# Altium PCB MADI_ESP32-S3_PCB.PcbDoc (part 3 of 3)
Units mm, origin at the board's own origin, x right, y up, seen from the top; angles counter-clockwise.
Board outline 30 x 21.59 mm, 4 copper layers (L1, L2 (GND), L3 (GND), L4), stack 1.564 mm thick; 54 components, 48 nets, 271 pads, 173 vias.
Unrouted connection lines stored in the file: 120.
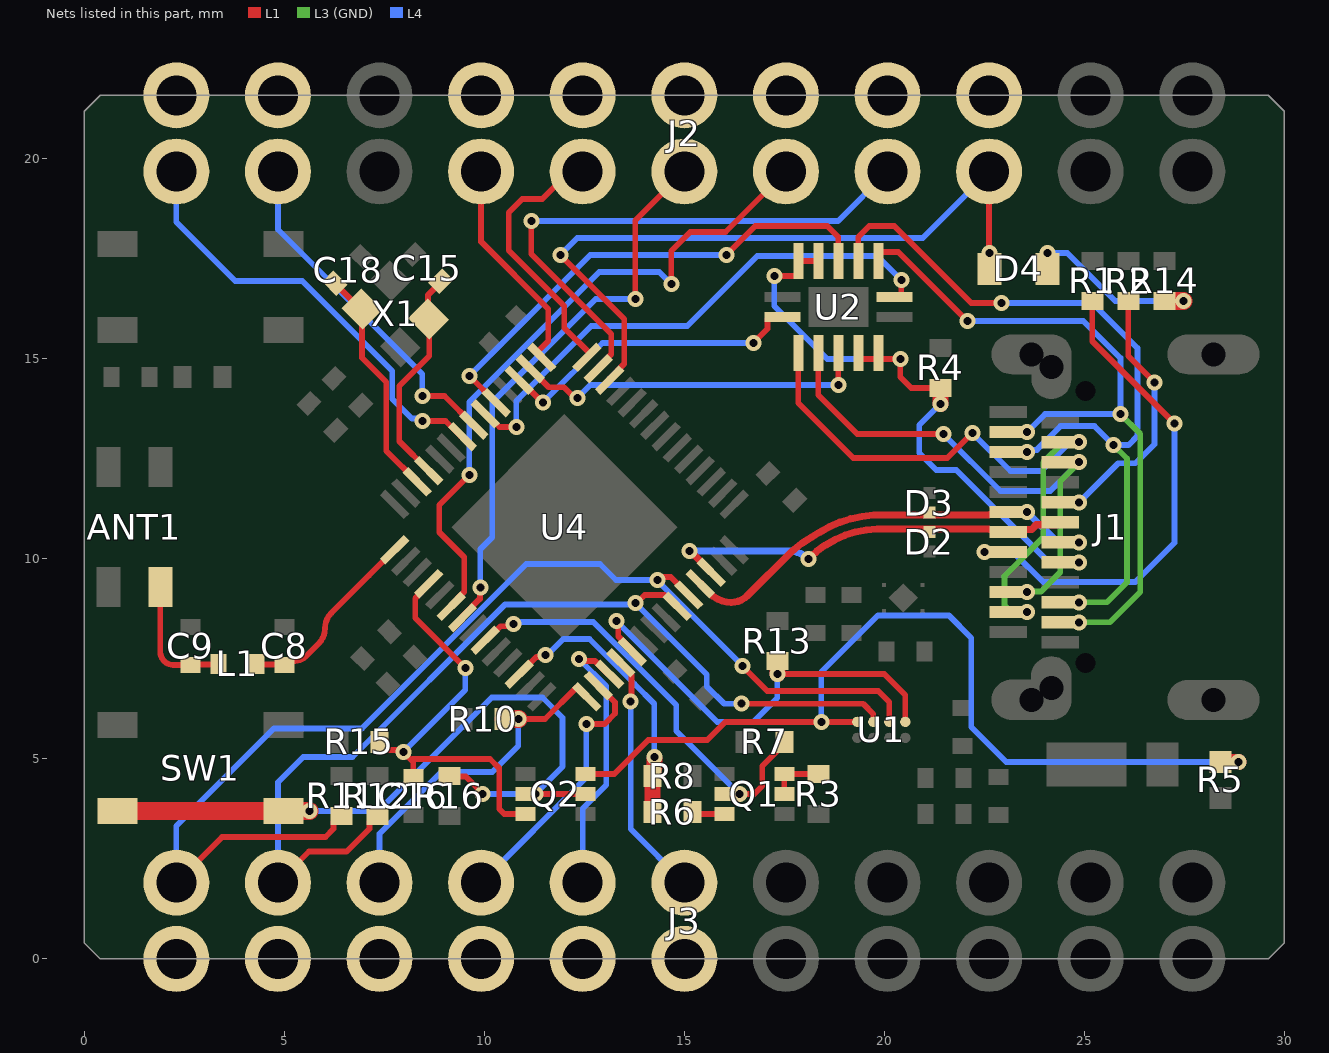
[diagram p4: the nets of this part, all layers, seen from the top]

## Via types
v1: diameter 0.4, hole 0.2, L1 to L4, tented both sides, 173 vias

## Nets (pads, with @x,y where several pads share a name; then routed paths per layer and width w, separated by ;. In a path a pad name is that pad's centre, name@x,y a point inside that pad or via, vN(x,y) a via of type N, cw(c..) or ccw(c..) an arc to the next point about the centre after c; other vN are vias at no path point) (continued)
IO1: J2.5 U4.6 | length 16.8
  L1 w0.146: U4.6@9.172,8.815 9.172,8.85 9.5,9.179 9.5,10.042 8.875,10.667 8.875,11.35 v1(9.625,12.1) ; v1(14.675,16.875) 14.675,17.7 15.15,18.175 16.03,18.175 J2.5@17.54,19.685
  L4 w0.146: v1(9.625,12.1) 9.625,13.925 12.875,17.175 14.374,17.175 v1(14.675,16.875)
IO2: J2.6 U4.7 | length 14
  L1 w0.146: U4.7@9.454,8.532 9.454,8.568 9.888,9.001 9.888,9.279 v1(9.9,9.291) ; v1(13.775,16.5) 13.775,18.46 J2.6@15,19.685
  L4 w0.146: v1(9.9,9.291) 9.9,10.241 10.2,10.541 10.2,13.916 12.784,16.5 v1(13.775,16.5)
IO4/EN_VBAT_MON: Q1.2 R7.2 U4.9 | length 11.1
  L1 w0.146: U4.9@10.02,7.967 10.055,7.967 10.406,8.318 10.668,8.318 v1(10.725,8.375) ; v1(16.375,4.125) 16.75,4.125 16.95,4.325 16.95,4.825 17.5,5.375 R7.2@17.5,5.425
  L1 w0.35: Q1.2@16,4.125 v1(16.375,4.125)
  L4 w0.146: v1(10.725,8.375) 10.775,8.425 12.725,8.425 14.8,6.35 14.8,5.7 v1(16.375,4.125)
IO7/VBAT_MON: R6.1 R8.2 U4.12 | length 7.2
  L1 w0.146: U4.12@10.869,7.118 11.303,7.552 11.477,7.552 v1(11.525,7.6)
  L1 w0.4: R6.1@14.2,3.625 14.2,4.525 14.225,4.55 14.225,4.767 14.25,4.792 v1@14.25,5
  L4 w0.146: v1(11.525,7.6) 11.576,7.6 11.976,8 12.63,8 13.755,6.875 14.25,6.38 v1@14.25,5
  other v1: 14.25,5.05
IO10/SPI_nCS: J3.9 R10.1 U4.15 | length 8.8
  L1 w0.146: v1(10.85,6) 11.518,6 12.301,6.782 12.336,6.782 U4.15@12.566,6.552
  L1 w0.45: R10.1@10.475,6 v1(10.85,6)
  L4 w0.146: J3.9@7.38,1.905 7.38,3.13 8.925,4.675 10.2,4.675 10.85,5.325 v1(10.85,6)
IO11/SPI_MOSI: J3.8 U4.16 | length 6.9
  L1 w0.146: v1(12.55,5.875) 13.007,5.875 13.267,6.135 13.267,6.417 U4.16@12.849,6.835
  L4 w0.146: J3.8@10.054,1.905 J3.8@9.92,1.905 12.55,4.535 v1(12.55,5.875)
IO12/SPI_CLK: J3.7 U4.17 | length 7
  L1 w0.146: v1(12.367,7.5) 12.415,7.452 12.762,7.452 13.096,7.118 U4.17@13.131,7.118
  L4 w0.146: v1(12.367,7.5) 13.05,6.817 13.05,4.35 12.46,3.76 J3.7@12.46,1.905
IO13/SPI_MISO: J3.6 U4.18 | length 6.2
  L1 w0.146: U4.18@13.414,7.401 13.414,7.366 13.678,7.102 13.678,6.46 v1(13.659,6.441)
  L4 w0.146: v1(13.659,6.441) 13.659,3.246 J3.6@15,1.905
IO14/nIRQ_BQ: R13.1 U1.A1 U4.19 | length 11.3
  L1 w0.146: v1(13.3,8.45) 13.348,8.402 13.348,8.068 13.697,7.719 U4.19@13.697,7.684 ; v1(17.325,7.125) 20,7.125 20.525,6.6 U1.A1@20.525,5.925
  L1 w0.4: v1(17.325,7.125) R13.1@17.325,7.45
  L4 w0.146: v1(13.3,8.45) 15.825,5.925 16.725,5.925 17.325,6.525 v1(17.325,7.125)
IO17/I2C_SDA: J3.10 R12.1 U1.C1 U4.23 | length 25.3
  L1 w0.146: J3.10@4.84,1.905 5.619,2.684 6.559,2.684 7.128,3.253 7.128,3.425 7.324,3.62 R12.1@7.325,3.62 ; v1(13.775,8.9) 13.809,8.9 14.009,9.1 14.508,9.1 14.793,8.815 U4.23@14.828,8.815 ; v1@16.425,6.375 v1(16.43,6.38) 19.47,6.38 19.725,6.125 U1.C1@19.725,5.925
  L4 w0.146: J3.10@4.84,1.905 4.84,4.415 5.475,5.05 6.707,5.05 10.522,8.864 13.739,8.864 v1(13.775,8.9) 15.562,7.113 15.562,6.813 15.995,6.38 v1(16.43,6.38)
IO18/I2C_SCL: J3.11 R11.1 U1.B1 U4.24 | length 29.8
  L1 w0.146: J3.11@2.3,1.905 3.445,3.05 6.027,3.05 6.232,3.255 6.232,3.426 6.404,3.598 R11.1@6.428,3.598 ; v1(14.325,9.475) 14.393,9.475 14.466,9.548 14.661,9.548 U4.24@15.111,9.098 ; v1(16.45,7.325) 17.075,6.7 19.85,6.7 20.125,6.425 U1.B1@20.125,5.925
  L4 w0.146: J3.11@2.3,1.905 2.3,3.325 4.738,5.763 6.938,5.763 11.05,9.875 12.894,9.875 13.294,9.475 v1(14.325,9.475) 14.325,9.463 16.45,7.338 v1(16.45,7.325)
IO35: D4.K J2.3 U4.40 | length 17.6
  L1 w0.146: v1(11.9,17.6) 13.5,16 13.5,14.876 13.131,14.507 U4.40@13.131,14.472 ; v1@22.6,17.65 22.62,17.67 J2.3@22.62,19.685
  L4 w0.146: v1(11.9,17.6) 12.325,18.025 20.96,18.025 J2.3@22.62,19.685
  other v1: 22.625,17.65
IO36: J2.4 U4.41 | length 14.1
  L1 w0.146: v1(11.175,18.45) 11.175,17.624 13.175,15.624 13.175,15.117 12.849,14.79 U4.41@12.849,14.755
  L4 w0.146: v1(11.175,18.45) 18.845,18.45 J2.4@20.08,19.685
IO37: J2.7 U4.42 | length 6.8
  L1 w0.146: J2.7@12.46,19.685 12.135,19.685 11.45,19 10.95,19 10.613,18.663 10.613,17.712 12,16.325 12,15.775 12.634,15.141 12.634,15.106 U4.42@12.566,15.038
IO38: J2.8 U4.43 | length 5.5
  L1 w0.146: J2.8@9.92,19.685 9.92,17.93 11.6,16.25 11.6,15.45 11.329,15.179 11.329,15.143 U4.43@11.434,15.038
IO39/TCLK: U2.11 U4.44 | length 8.9
  L1 w0.146: U4.44@11.151,14.755 11.151,14.752 11.61,14.294 11.993,14.294 12.261,14.025 v1(12.325,14.025) ; v1(18.85,14.35) U2.11@18.85,15.15
  L4 w0.146: v1(12.325,14.025) 12.65,14.35 v1(18.85,14.35)
IO40/TDO: U2.8 U4.45 | length 7.7
  L1 w0.146: U4.45@10.869,14.472 10.89,14.472 11.447,13.914 v1(11.468,13.914) ; v1(16.725,15.4) 17.078,15.753 17.078,16 17.128,16.05 U2.8@17.3,16.05
  L4 w0.146: v1(11.468,13.914) 12.953,15.4 v1(16.725,15.4)
IO41/TDI: U2.4 U4.47 | length 12.4
  L1 w0.146: v1(9.625,14.575) 9.63,14.575 10.298,13.906 U4.47@10.303,13.906 ; v1(16.05,17.6) 16.775,18.325 18.575,18.325 18.85,18.05 U2.4@18.85,17.45
  L4 w0.146: v1(9.625,14.575) 12.65,17.6 v1(16.05,17.6)
IO42/TMS: U2.1 U4.48 | length 13.5
  L1 w0.146: U4.48@10.02,13.623 10.055,13.623 10.379,13.3 v1(10.8,13.3) ; U2.1@20.25,16.55 20.375,16.55 20.425,16.6 v1(20.425,16.975)
  L4 w0.146: v1(10.8,13.3) 10.8,13.95 12.675,15.825 15.075,15.825 16.825,17.575 19.825,17.575 v1(20.425,16.975)
MR: Q2.6 R5.2 U1.D1 | length 22.9
  L1 w0.146: Q2.6@12.525,4.625 13.25,4.625 14.1,5.475 15.575,5.475 16.025,5.925 U1.D1@19.325,5.925
  L1 w0.4: R5.2@28.4,4.925 v1(28.85,4.925)
  L4 w0.146: v1(18.425,5.925) 18.425,7.172 19.842,8.589 21.611,8.589 22.175,8.025 22.175,5.8 23.05,4.925 v1(28.85,4.925)
NetANT1_1: ANT1.1 C9.2 L1.2 | length 3.3
  L1 w0.146: ANT1.1@1.9,9.295 1.9,7.675 ccw(c2.225,7.675) 2.225,7.35 C9.2@2.65,7.35 2.662,7.362 3.337,7.362 L1.2@3.35,7.375
NetC8_2: C8.2 L1.1 U4.1 | length 5.7
  L1 w0.146: L1.1@4.3,7.375 4.312,7.362 C8.2@4.962,7.362 ; C8.2@5,7.35 5.1,7.45 5.262,7.45 ccw(c5.262,7.842) 5.54,7.565 5.859,7.884 ccw(c5.475,8.268) 6.018,8.268 cw(c6.561,8.268) 6.177,8.652 ; 6.177,8.652 7.754,10.229 U4.1@7.757,10.229 7.114,9.586
NetC15_1: C15.1 U4.53 X1.1 | length 5.5
  L1 w0.146: U4.53@8.606,12.209 7.875,12.94 7.875,14.325 8.624,15.074 8.624,15.984 X1.1@8.606,16.001 8.588,16.019 8.588,16.59 8.911,16.913 C15.1@8.911,16.939
NetC18_1: C18.1 U4.54 X1.3 | length 5.9
  L1 w0.146: C18.1@6.264,16.889 6.922,16.231 6.962,16.231 6.962,15.842 6.944,15.824 6.944,15.031 7.55,14.425 7.55,12.699 U4.54@8.323,11.926
NetD4_A: D4.A R14.1 | length 4.2
  L1 w0.45: R14.1@27,16.45 v1(27.475,16.45)
  L4 w0.146: v1(24.075,17.65) 24.575,17.65 25.775,16.45 v1@27.35,16.45
NetJ1_A5: J1.A5 R1.2 | length 12.4
  L1 w0.146: R1.2@25.2,16.45 25.2,15.441 27.251,13.39 v1(27.256,13.39)
  L4 w0.146: v1(22.506,10.17) 23.226,10.17 23.971,9.425 26.275,9.425 27.256,10.406 v1(27.256,13.39)
NetJ1_B5: J1.B5 R2.2 | length 6.3
  L1 w0.146: R2.2@26.1,16.45 26.1,15.071 v1(26.756,14.415)
  L4 w0.146: v1(24.87,11.415) 25.845,12.39 26.281,12.39 26.756,12.865 v1(26.756,14.415)
NetQ1_3: Q1.3 R6.2 | length 0.8
  L1 w0.146: R6.2@15.2,3.675 15.25,3.625 Q1.3@16,3.625
NetQ1_5: Q1.5 Q1.6 R3.1 | length 1.3
  L1 w0.146: Q1.5@17.5,4.125 Q1.6@17.5,4.625 R3.1@18.35,4.625
NetQ2_2: Q2.2 Q2.5 R16.2 SW1.1 SW1.2 | length 18.3
  L1 w0.146: R16.2@9.125,4.575 9.137,4.563 9.537,4.563 9.95,4.15 v1(9.95,4.125) ; v1(11.275,4.125) Q2.5@12.525,4.125
  L1 w0.45: SW1.2@0.825,3.7 SW1.1@4.975,3.7 v1(5.625,3.7)
  L4 w0.146: v1(5.625,3.7) 7.35,3.7 10.185,6.535 11.452,6.535 11.957,6.03 11.957,4.807 v1(11.275,4.125) v1(9.95,4.125)
nRESET: C16.2 Q2.3 R15.1 U4.4 | length 11
  L1 w0.146: R15.1@7.375,5.425 7.375,5.375 7.525,5.225 7.925,5.225 v1(7.975,5.175) 8.225,4.925 ; C16.2@8.225,4.55 8.225,5 10.14,5 10.375,4.765 10.375,3.75 10.5,3.625 Q2.3@11.025,3.625 ; U4.4@8.606,9.381 8.606,9.345 8.275,9.015 8.275,8.525 v1(9.525,7.275)
  L4 w0.146: v1(7.975,5.175) 9.525,6.725 v1(9.525,7.275)
SW_CONTROL: J1.B8 R4.2 U2.5 U2.6 U2.12 U2.13 | length 15.7
  L1 w0.146: v1(17.25,17.075) 17.8,17.075 17.85,17.125 U2.6@17.85,17.175 ; U2.6@17.85,17.238 U2.6@17.85,17.45 U2.5@18.35,17.45 ; U2.12@19.35,15.15 19.35,15.05 19.4,15 19.8,15 U2.13@19.85,15.05 ; U2.13@19.85,15.15 U2.13@19.85,15.05 ; R4.2@21.4,14.275 20.675,14.275 20.4,14.55 v1(20.4,15) 19.9,15 U2.13@19.85,15.05
  L1 w0.4: v1(21.4,13.875) R4.2@21.4,14.275
  L4 w0.146: v1(17.25,17.075) 17.25,16.325 18.575,15 v1(20.4,15) ; v1(21.4,13.875) 20.875,13.35 20.875,12.65 21.3,12.225 21.8,12.225 24.11,9.915 v1(24.87,9.915)
TCLK_SW: J1.A3 J1.B3 U2.10 | length 12.8
  L1 w0.146: U2.10@18.35,15.15 18.35,14.1 19.325,13.125 v1(21.475,13.125)
  L3 (GND) w0.146: v1(23.57,9.175) 23.579,9.184 23.92,9.184 24.4,9.664 24.4,11.945 v1@24.87,12.415
  L4 w0.146: v1(21.475,13.125) 22.903,11.697 24.147,11.697 v1(24.867,12.418)
TDI_SW: J1.A10 J1.B10 U2.3 | length 19.4
  L1 w0.146: U2.3@19.35,17.45 19.35,18.05 19.625,18.325 20.25,18.325 22.175,16.4 v1(22.925,16.4)
  L3 (GND) w0.146: v1(24.87,8.915) 25.565,8.915 26.066,9.416 26.066,12.51 v1(25.731,12.845)
  L4 w0.146: v1(22.925,16.4) 25.2,16.4 26.326,15.274 26.326,13.064 26.106,12.845 v1(25.731,12.845) 25.256,13.32 24.406,13.32 23.813,12.727 23.622,12.727 v1(23.57,12.675)
TDO_SW: J1.A2 J1.B2 U2.9 | length 15.5
  L1 w0.146: U2.9@17.85,15.15 17.85,13.9 19.225,12.525 21.575,12.525 v1(22.2,13.15)
  L3 (GND) w0.146: v1(23.57,8.675) 23.176,8.675 23.006,8.845 23.006,9.57 23.975,10.539 23.975,12.414 24.481,12.92 24.865,12.92 v1@24.87,12.915
  L4 w0.146: v1(22.2,13.15) 23.153,12.197 23.922,12.197 24.604,12.879 24.829,12.879 v1(24.867,12.918)
TMS_SW: J1.A11 J1.B11 U2.2 | length 17.8
  L1 w0.146: U2.2@19.85,17.45 19.85,17.625 19.9,17.675 20.35,17.675 v1(22.075,15.95)
  L3 (GND) w0.146: v1(24.87,8.415) 25.64,8.415 26.4,9.175 26.4,13.126 v1(25.906,13.62)
  L4 w0.146: v1(22.075,15.95) 24.975,15.95 25.906,15.019 ; v1(23.57,13.175) 24.015,13.62 v1(25.906,13.62) 25.906,15.03
U0RXD: J2.11 U4.50 | length 11
  L1 w0.146: v1(8.45,13.45) 9.027,13.45 9.419,13.058 U4.50@9.454,13.058
  L4 w0.146: J2.11@2.3,19.685 2.3,18.425 3.775,16.95 5.45,16.95 7.7,14.7 7.7,14 8.193,13.507 8.393,13.507 v1(8.45,13.45)
U0TXD: J2.10 U4.49 | length 8.7
  L1 w0.146: v1(8.45,14.075) 9.003,14.075 U4.49@9.737,13.341
  L4 w0.146: J2.10@4.84,19.685 4.84,18.235 8.45,14.625 v1(8.45,14.075)
USB_D_N: D3.1 J1.A7 J1.B7 U4.25 | length 10.3
  L1 w0.18: U4.25@15.408,9.381 U4.25@15.394,9.381 15.641,9.134 ccw(c16.174,9.667) 16.171,8.913 16.173,8.913 ccw(c16.174,9.48) 16.575,9.08 17.671,10.176 17.938,10.39 18.365,10.658 cw(c19.897,8.221) 19.726,11.095 19.753,11.097 cw(c19.901,7.946) 19.901,11.1 19.903,11.1 21.125,11.1 22.615,11.1 22.627,11.113 23.038,11.113 J1.A7@23.1,11.175
  L4 w0.18: v1(23.57,11.175) 24.33,10.415 v1(24.87,10.415)
USB_D_P: D2.1 J1.A6 J1.B6 U4.26 | length 10.4
  L1 w0.18: v1(15.125,10.2) cw(c15.125,10.162) 15.152,10.189 U4.26@15.677,9.664 ; v1(18.1,10) cw(c19.897,8.221) 19.822,10.749 cw(c19.901,7.946) 19.901,10.75 21.125,10.75 22.615,10.75 22.627,10.737 23.038,10.737 J1.A6@23.1,10.675 23.162,10.737 23.684,10.737 23.799,10.853 24.338,10.853 J1.B6@24.4,10.915
  L4 w0.18: v1(15.125,10.2) 17.617,10.2 cw(c17.617,9.517) 18.006,10.078 cw(c17.617,9.517) v1(18.1,10)
pads on no net: J1.0 J1.A8 U4.8 U4.10 U4.11 U4.13 U4.14 U4.21 U4.22 U4.27 U4.28 U4.30 U4.31 U4.32 U4.33 U4.34 U4.35 U4.36 U4.37 U4.38 U4.39 U4.51 U4.52

## Polygon pours and split planes (outlines as drawn)
+VIN_5V0 on L1 "NONET_L-01_P-001" (solid, remove dead copper, pour order 5): 24.55,3.725 25.175,3.725 25.65,3.25 26.05,3.65 26.05,5.405 25.815,5.64 20.525,5.64 20.525,5.41 20.915,5.41 21.325,5 22.35,5 22.6,4.75 22.6,4.35 23.925,4.35
IO14/nIRQ_BQ on L1 "NONET_L-01_P-001" (solid, remove dead copper, pour order 42): 17.6,7.675 17.6,7.225 17.7,7.125 17.325,7.125 17.325,7.675
+VSYS on L1 "NONET_L-01_P-001" (solid, remove dead copper, pour order 0): 21.225,4.825 21.075,4.975 20.75,4.975 20.24,5.485 20.24,5.525 20.01,5.525 20.01,4.44 20.175,4.275 21.225,4.275
GND on L1 "NONET_L-01_P-001" (solid, remove dead copper, pour order 3): 18.85,5 18.85,4.375 18.95,4.275 19.325,4.275 19.44,4.39 19.44,5.525 19.325,5.64 18.665,5.64 18.575,5.55 18.575,5.275
+VBAT on L1 "NONET_L-01_P-001" (solid, remove dead copper, pour order 4): 19.125,2.035 19.125,3.05 18.775,3.4 17.3,3.4 17.25,3.45 17.25,3.8 17.3,3.85 19.175,3.85 19.61,4.285 19.61,5.525 19.84,5.525 19.84,4.285 20.25,3.875 21.225,3.875 21.225,2.225 20.905,1.905 19.255,1.905
GND on L1 "NONET_L-01_P-001" (solid, remove dead copper, pour order 6): 22.175,4.775 22.175,4.225 22.6,3.8 23.1,3.8 23.445,3.455 23.445,1.905 21.795,1.905 21.775,1.925 21.775,4.775
+3V3 on L1 "NONET_L-01_P-001" (solid, remove dead copper, pour order 7): 5.65,5.15 6.153,4.647 6.153,4.351 7.599,4.351 7.6,4.35 7.6,4.8 6.825,4.8 6.6,5.025 6.6,5.8 6.7,5.9 7.9,5.9 8.622,5.178 10.978,5.178 11.374,5.574 10.726,5.574 10.725,5.575 9.85,5.575 9.7,5.725 9.7,6.6 9.375,6.925 8.025,8.275 8.025,9.224 8.694,9.893 8.27,10.318 7.575,9.623 7.575,9.353 7,8.778 7,8.528 7.588,7.94 8.45,7.078 8.45,6.65 8.1,6.3 0.225,6.3 0.225,5.525 0.6,5.15
GND on L1 "NONET_L-01_P-001" (solid, remove dead copper, pour order 8): 22.63,7.76 22.63,8.327 23.57,8.327 23.83,8.067 24.87,8.067 24.87,7.762 24.684,7.577 24.684,6.114 24.525,5.955 21.325,5.955 21.225,6.055 21.225,6.355
GND on L1 "NONET_L-01_P-001" (solid, remove dead copper, pour order 9): 6.194,6.556 6.075,6.675 6.125,6.725 6.125,7.7 6.525,8.1 6.65,8.1 7.911,6.839 7.629,6.556
+3V3 on L1 "NONET_L-01_P-001" (solid, remove dead copper, pour order 10): 7.987,10.989 6.55,12.427 5.883,13.094 6.948,14.159 7.231,13.876 7.231,12.594 8.411,11.414
GND on L1 "NONET_L-01_P-001" (solid, remove dead copper, pour order 12): 26.375,17.225 24.925,17.225 24.925,17.675 25.3,18.05 26,18.05 26.375,17.675
GND on L1 "NONET_L-01_P-001" (solid, remove dead copper, pour order 13): 7.669,16.443 7.139,16.974 7.139,17.075 6.618,17.596 7.171,18.15 8.054,18.15 8.557,17.646 8.204,17.293 8.204,16.978 8.164,16.938
GND on L1 "NONET_L-01_P-001" (solid, remove dead copper, pour order 17): 22.681,13.975 22.381,13.675 22.534,13.523 23.67,13.523 23.93,13.263 24.87,13.263 24.87,13.567 24.681,13.756 24.681,15.113 22.681,15.113
+VBUS on L1 "NONET_L-01_P-001" (solid, remove dead copper, pour order 18): 23.938,9.567 23.93,9.56 23.93,9.262 25.267,9.262 25.95,8.58 25.95,5.875 26.55,5.275 26.55,4.425 27.35,4.425 27.35,5.625 26.85,6.125 26.85,11.375 26.158,12.067 23.893,12.067 23.898,12.062 23.898,11.762 25.567,11.762 25.95,11.38 25.95,9.905 25.612,9.567
+VDD_SPI on L1 "NONET_L-01_P-001" (solid, remove dead copper, pour order 21): 15.871,11.191 16.625,11.945 16.623,12.002 17.099,12.479 17.407,12.171 16.226,10.989 16.013,10.989 15.871,11.131
+3V3 on L1 "NONET_L-01_P-001" (solid, remove dead copper, pour order 25): 14.462,7.485 14.462,7.099 14.57,6.991 14.959,7.38 14.85,7.489 14.457,7.489
GND on L1 "NONET_L-01_P-001" (solid, remove dead copper, pour order 32): 17.95,8.35 17.95,7.75 18.27,7.43 20.25,7.43 20.25,7.93 20.265,7.944 20.265,8.68 20.115,8.83 19.875,8.83 19.875,8.488 19.737,8.35
+VSYS on L1 "NONET_L-01_P-001" (solid, remove dead copper, pour order 33): 21.211,9.65 21.25,9.611 21.25,8.375 21.25,7.1 21.2,7.05 20.85,7.05 20.8,7.1 20.8,8.35 20.685,8.465 20.685,8.68 20.835,8.83 20.835,9.22 20.685,9.37 20.685,9.585 20.75,9.65
GND on L1 "NONET_L-01_P-001" (solid, remove dead copper, pour order 37): 7.975,3.8 7.975,3.2 8.325,2.85 9.05,2.85 9.4,3.2 9.4,3.8
nRESET on L1 "NONET_L-01_P-001" (solid, remove dead copper, pour order 38): 8.475,4.827 8.624,4.976 8.575,5.025 7.9,5.7 7.15,5.7 7.15,5.15 7.6,5.15 7.975,4.775 7.975,4.35 8.475,4.35
GND on L1 "NONET_L-01_P-001" (solid, remove dead copper, pour order 40): 20.306,8.488 20.306,7.985 20.265,7.944 19.875,8.334 19.875,8.83 19.912,8.83 20.475,9.393 20.843,9.025
+3V3 on L1 "NONET_L-01_P-001" (solid, remove dead copper, pour order 41): 19.795,8.9 18.725,8.9 18.725,9.275 19.1,9.65 20.225,9.65 20.265,9.61 20.265,9.37
+3V3 on L4 "NONET_L-01_P-001" (solid, remove dead copper, pour order 15): 8.073,9.473 8.073,7.99 7.991,7.909 7.25,8.65 6.875,9.025 6.875,10.157 7.559,9.473
+3V3 on L4 "NONET_L-01_P-001" (solid, remove dead copper, pour order 28): 18.725,9.1 17.85,9.1 18.725,9.975
+VSYS on L4 "NONET_L-01_P-001" (solid, remove dead copper, pour order 29): 20.175,5.05 20.175,4.1 20.55,3.725 23.375,3.725 24.335,2.765 24.335,1.905 25.985,1.905 25.985,3.04 24.75,4.275 20.9,4.275 20.575,4.6 20.575,5.05
GND on L3 (GND) "NONET_L-01_P-001" (solid, remove dead copper, pour order 24): -2.5,25 -2.5,-2.5 32.5,-2.5 32.5,25
GND on L2 (GND) "NONET_L-01_P-001" (solid, remove dead copper, pour order 23): -2.5,25 -2.5,-2.5 32.5,-2.5 32.5,25

## Keep-outs
Keep-Out Layer:
  text ".Layer_Name" at 22,-15.5 h1.52

## Other copper
L1:
  rectangle net GND: 21.55,5.955 22.325,6.25
  text ".Layer_Name" at 22,-15.5 h1.52
L2 (GND):
  text ".Layer_Name" at 22,-15.5 h1.52
L3 (GND):
  text ".Layer_Name" at 22,-15.5 h1.52
L4:
  text ".Layer_Name" at 22,-15.5 h1.52
Multi-Layer:
  pour cut-out: 6,12.795 6,8.795 0,8.795 0,12.795

## Silkscreen, mask and mechanical layers (free items; w line width, h text height)
Top Overlay:
  region: 115.3,51.8
  text ".VersionRevision" at 27.973,16.372 h1.5
  text ".Layer_Name" at 22,-15.5 h1.52
Bottom Overlay:
  text "RX" at 1.746,16.775 h1.5 r270
  text "TX" at 4.286,16.75 h1.5 r270
  text "IO1" at 16.986,16.722 h1.5 r270
  text "IO2" at 14.446,16.557 h1.5 r270
  text "GND" at 24.606,15.94 h1.5 r270
  text "3V3" at 27.146,15.94 h1.5 r270
  text "BOOT" at 0.575,15.837 h1.5 r180
  text "IO35" at 22.066,15.838 h1.5 r270
  text "GND" at 6.826,15.822 h1.5 r270
  text "IO38" at 9.366,15.822 h1.5 r270
  text "IO37" at 11.906,15.822 h1.5 r270
  text "IO36" at 19.526,15.819 h1.5 r270
  text "`" at 9.745,7.212 h15 r270
  text "ESP32-S3" at 6.925,7.094 h2.5 r270
  text "RST" at 0.665,6.887 h1.5 r180
  text "SCL" at 1.871,3.1 h1.5 r270
  text "SDA" at 4.411,3.1 h1.5 r270
  text "nCS" at 6.951,3.101 h1.5 r270
  text "MOSI" at 9.491,3.1 h1.5 r270
  text "SCK" at 12.031,3.1 h1.5 r270
  text "MISO" at 14.571,3.1 h1.5 r270
  text "GND" at 16.998,3 h1.5 r270
  text "BAT" at 19.551,3 h1.5 r270
  text "GND" at 22.078,3 h1.5 r270
  text "SYS" at 24.618,3 h1.5 r270
  text "VIN" at 27.159,3 h1.5 r270
  text ".Layer_Name" at 22,-15.5 h1.52
Top Paste:
  text ".Layer_Name" at 22,-15.5 h1.52
Bottom Paste:
  text ".Layer_Name" at 22,-15.5 h1.52
Top Solder:
  text ".Layer_Name" at 22,-15.5 h1.52
Bottom Solder:
  text ".Layer_Name" at 22,-15.5 h1.52
Drill Guide:
  text ".Layer_Name" at 22,-15.5 h1.52
Board Outline:
  the board outline again, w0
  text ".Layer_Name" at 22,-15.5 h1.52
Top Assembly:
  text "COMPONENTS MARKED 'DNP' SHOULD NOT BE POPULATED." at 0,-7.001 h1.52
  text ".Layer_Name" at 22,-15.5 h1.52
Bottom Assembly:
  text "COMPONENTS MARKED 'DNP' SHOULD NOT BE POPULATED." at 131,-7.001 h1.52
  text ".Layer_Name" at 22,-15.5 h1.52
Top Courtyard:
  text ".Layer_Name" at 22,-15.5 h1.52
Bottom Courtyard:
  text ".Layer_Name" at 22,-15.5 h1.52
Top 3D Body:
  text ".Layer_Name" at 22,-15.5 h1.52
Bottom 3D Body:
  text ".Layer_Name" at 22,-15.5 h1.52
Top Designator:
  text ".Layer_Name" at 22,-15.5 h1.52
Bottom Designator:
  text ".Layer_Name" at 22,-15.5 h1.52
Gerber Information:
  lines w0.1: 0,-17 111,-17 ; 0,-12.5 131,-12.5 ; 55,-21.5 55,-8 ; 111,-21.5 111,-8 ; 0,-21.5 0,-8 131,-8 131,-21.5 0,-21.5
  text "ALL ARTWORK VIEWED FROM TOP SIDE" at 2,-11 h1.52
  text "PRJ TITLE =" at 57.5,-11 h1.52
  text ".Project" at 76,-11 h1.52
  text "REV =" at 113,-11 h1.52
  text ".VersionRevision" at 122.5,-11 h1.52
  text "LAYER NAME =" at 2,-15.5 h1.52
  text "PRJ # =" at 57.5,-15.5 h1.52
  text ".ProjectNumber" at 70,-15.5 h1.52
  text "DRAWN BY" at 113,-15.5 h1.52
  text ".DrawnBy" at 115.5,-19.5 h1.52
  text "CONTACT =" at 2,-20 h1.52
  text ".Contact" at 17.5,-20 h1.52
  text "GENERATED =" at 57.5,-20 h1.52
  text ".Print_Date" at 76.5,-20 h1.52
  text ".Print_Time" at 94,-20 h1.52
Fab Notes:
  lines w0.2: 2.3,0 33.605,0 32.285,1.32 32.285,0.02 ; 2.3,21.59 33.605,21.59 32.285,22.91 32.285,21.61 ; 34.595,10.895 34.595,12.195 33.275,10.875 57.575,10.875
  lines w2.5: 31.25,5.795 31.25,15.795
  text "TYPE;" at 103.325,125.2 h2.54
  text "Impedance;" at 116.025,125.2 h2.54
  text "Layer (Reference);" at 136.345,125.174 h2.54
  text "Width (um);" at 171.905,125.174 h2.54
  text "Gap (um);" at 194.765,125.172 h2.54
  text "50 ohm;" at 116.025,122.655 h2.54
  text "146" at 171.905,122.655 h2.54
  text "SE;" at 103.325,122.632 h2.54
  text "L1(L2), L4(L3);" at 136.345,122.634 h2.54
  text "DIFF;" at 103.325,120.16 h2.54
  text "90 ohm;" at 116.025,120.155 h2.54
  text "L1(L2), L4(L3);" at 136.345,120.134 h2.54
  text "180;" at 171.905,120.155 h2.54
  text "170;" at 194.805,120.155 h2.54
  text "Files / *.GTO - Top Overlay / *.GTP - Top Paste / *.GTS - Top Solder / *.GTL - L1 / *.G1 - L2 (GND) / *.G2  - L3 / *.GBL - L4 / *.GBS - Bottom Solder / *.GBP - Bottom Paste / *.GBO - Bottom Overlay / *.GM1 - Board Outline / *.GM12 - Fab Notes / *.GD1 - Drill Drawing / *.GG1 - Drill Guide /  / Layer Stack Table: JLC3313" at 0,110.698 h2.54
  text "BOARD INFORMATION /  / Minimum Track: 146um / Minimum Gap: 100um / Minimum Through Hole VIA: 0.20mm (drill). Drilling: L1-L4 /  / 1. REMOVE ALL NON-FUNCTIONAL INNER LAYER PADS. /  / 2. THIS BOARD CONTAINS IMPEDANCE CONTROLLED TRACKS, TRACK AND GAP SIZES ARE AS FOLLOWS: /  /  /  /  /  /  /  / 3. FINISHED PANEL THICKNESS IS NOT CRITICAL: TO BE APPROXIMATELY 1.6mm /  / 4. SURFACE FINISH: Immersion Gold (ENIG) /  / 5. SOLDER RESIST: APPLY TO BOTH SIDES COLOR - MATT GREEN /  / 6. COMPONENT IDENT: COLOR TO BE WHITE /  / 7. PANEL BY PCB MANUFACTURER" at 100,94.652 h2.54
  text "Castellated edges" at 34.035,21.671 h1.52
  text "This slot must be in a panel design." at 35.775,11.561 h1.52
  text "Castellated edges" at 34.035,0.081 h1.52
  text ".Layer_Name" at 22,-15.5 h1.52
Drill Drawing:
  circle w0.254: c2.556,69.362 r0.847
  lines w0.254: 1.709,60.895 2.556,61.318 3.403,60.895 2.979,61.742 3.403,62.588 2.556,62.165 1.709,62.588 2.133,61.742 1.709,60.895 ; 1.709,66.398 3.403,66.398 2.556,64.705 1.709,66.398 ; 1.709,72.325 3.403,72.325 3.403,74.018 1.709,74.018 1.709,72.325 ; 1.709,76.558 2.133,76.558 2.556,76.135 2.979,76.558 3.403,76.558 2.979,76.982 3.403,77.405 2.979,77.405 2.556,77.828 2.133,77.405 1.709,77.405 2.133,76.982 1.709,76.558 ; 1.709,80.368 2.133,80.368 2.133,79.945 2.979,79.945 2.979,80.368 3.403,80.368 3.403,81.215 2.979,81.215 2.979,81.638 2.133,81.638 2.133,81.215 1.709,81.215 1.709,80.368
  lines w0.381: 0.191,59.752 196.529,59.752 ; 0.191,82.612 196.529,82.612 ; 14.183,55.942 14.183,86.422 ; 29.419,55.942 29.419,86.422 ; 57.351,55.942 57.351,86.422 ; 70.2,55.942 70.2,86.422 ; 88.838,55.942 88.838,86.422 ; 119.056,55.942 119.056,86.422 ; 134.038,55.942 134.038,86.422 ; 152.981,55.942 152.981,86.422 ; 0.191,55.942 196.529,55.942 196.529,86.422 0.191,86.422 0.191,55.942
  text "Symbol" at 2.476,83.755 h1.83
  text "Count" at 15.326,83.755 h1.83
  text "Hole Size" at 30.562,83.755 h1.83
  text "Plated" at 58.494,83.755 h1.83
  text "Hole Type" at 71.343,83.755 h1.83
  text "Drill Layer Pair" at 89.981,83.755 h1.83
  text "Via/Pad" at 120.199,83.755 h1.83
  text "Pad Shape" at 135.181,83.755 h1.83
  text "Template" at 154.124,83.755 h1.83
  text "173" at 15.326,79.945 h1.52
  text "0.200mm (7.87mil)" at 30.562,79.945 h1.52
  text "PTH" at 58.494,79.945 h1.52
  text "Round" at 71.343,79.945 h1.52
  text "L1 - L4" at 89.981,79.945 h1.52
  text "Via" at 120.199,79.945 h1.52
  text "Rounded" at 135.181,79.945 h1.52
  text "v40h20m0mx0" at 154.124,79.945 h1.52
  text "2" at 15.326,76.135 h1.52
  text "0.500mm (19.69mil)" at 30.562,76.135 h1.52
  text "NPTH" at 58.494,76.135 h1.52
  text "Round" at 71.343,76.135 h1.52
  text "L1 - L4" at 89.981,76.135 h1.52
  text "Pad" at 120.199,76.135 h1.52
  text "Rounded" at 135.181,76.135 h1.52
  text "c0hn50m55" at 154.124,76.135 h1.52
  text "2" at 15.326,72.325 h1.52
  text "0.600mm (23.62mil)" at 30.562,72.325 h1.52
  text "PTH" at 58.494,72.325 h1.52
  text "Slot" at 71.343,72.325 h1.52
  text "L1 - L4" at 89.981,72.325 h1.52
  text "Pad" at 120.199,72.325 h1.52
  text "Rounded" at 135.181,72.325 h1.52
  text "(Mixed)" at 154.124,72.325 h1.52
  text "2" at 15.326,68.515 h1.52
  text "0.600mm (23.62mil)" at 30.562,68.515 h1.52
  text "PTH" at 58.494,68.515 h1.52
  text "Slot" at 71.343,68.515 h1.52
  text "L1 - L4" at 89.981,68.515 h1.52
  text "Pad" at 120.199,68.515 h1.52
  text "Rounded" at 135.181,68.515 h1.52
  text "(Mixed)" at 154.124,68.515 h1.52
  text "2" at 15.326,64.705 h1.52
  text "0.600mm (23.62mil)" at 30.562,64.705 h1.52
  text "PTH" at 58.494,64.705 h1.52
  text "Slot" at 71.343,64.705 h1.52
  text "L1 - L4" at 89.981,64.705 h1.52
  text "Pad" at 120.199,64.705 h1.52
  text "Rounded" at 135.181,64.705 h1.52
  text "r230_100h60_190r100m235_105" at 154.124,64.705 h1.52
  text "44" at 15.326,60.895 h1.52
  text "1.000mm (39.37mil)" at 30.562,60.895 h1.52
  text "PTH" at 58.494,60.895 h1.52
  text "Round" at 71.343,60.895 h1.52
  text "L1 - L4" at 89.981,60.895 h1.52
  text "Pad" at 120.199,60.895 h1.52
  text "Rounded" at 135.181,60.895 h1.52
  text "c165h100" at 154.124,60.895 h1.52
  text "225 Total" at 15.326,57.085 h1.52
  text "Slot definitions :" at 2.476,53.403 h1.52
  text "Routed Path Length" at 28.707,53.403 h1.52
  text "= Calculated from tool start centre position to tool end centre position." at 56.715,53.403 h1.52
  text "Hole Length" at 28.707,50.863 h1.52
  text "= Routed Path Length + Tool Size = Slot length as defined in the PCB layout" at 46.304,50.863 h1.52
  text ".Layer_Name" at 22,-15.5 h1.52

## Dimensions
0.4,0 to 0.4,21.59 on Dimensions
0,21.19 to 30,21.19 on Dimensions